# Altium PCB zrxpcb.PcbDoc
Units mm, origin at the board's own origin, x right, y up, seen from the top; angles counter-clockwise.
Board outline 152.4 x 101.6 mm, 2 copper layers (Top Layer, Bottom Layer); 64 components, 60 nets, 272 pads, 51 vias.
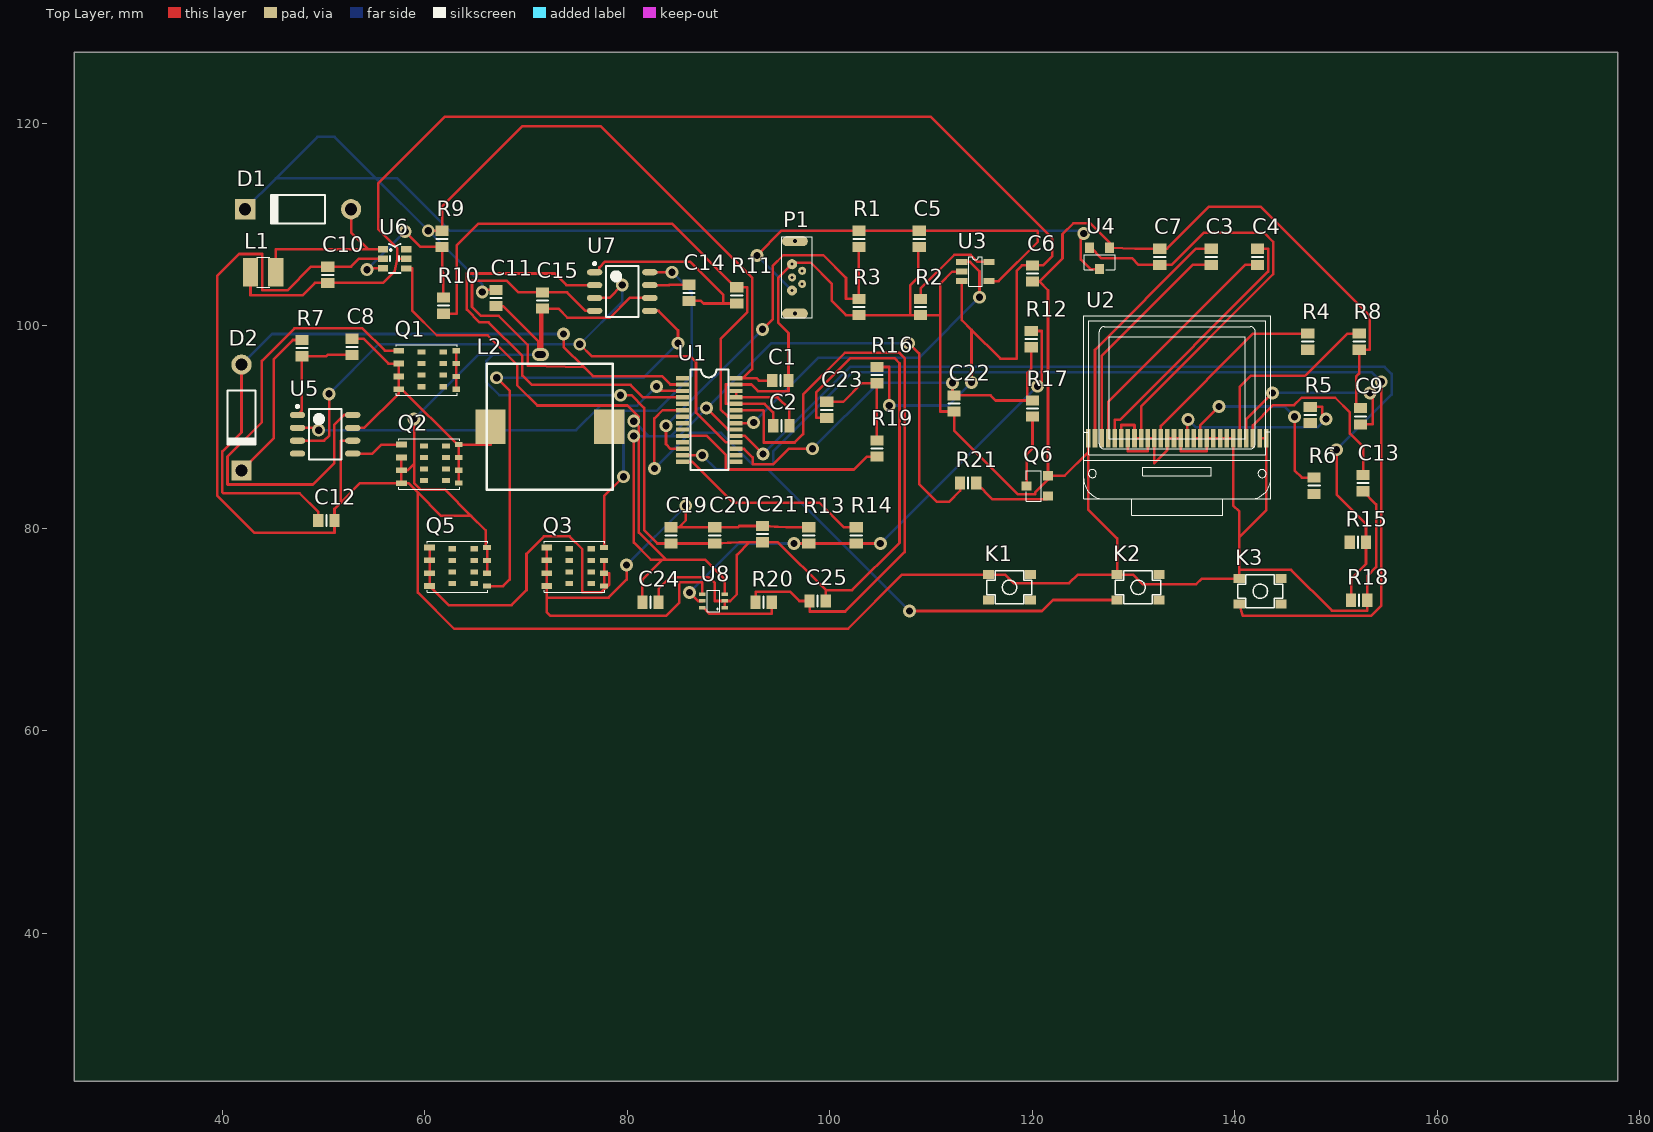
[diagram p0: Top Layer view]
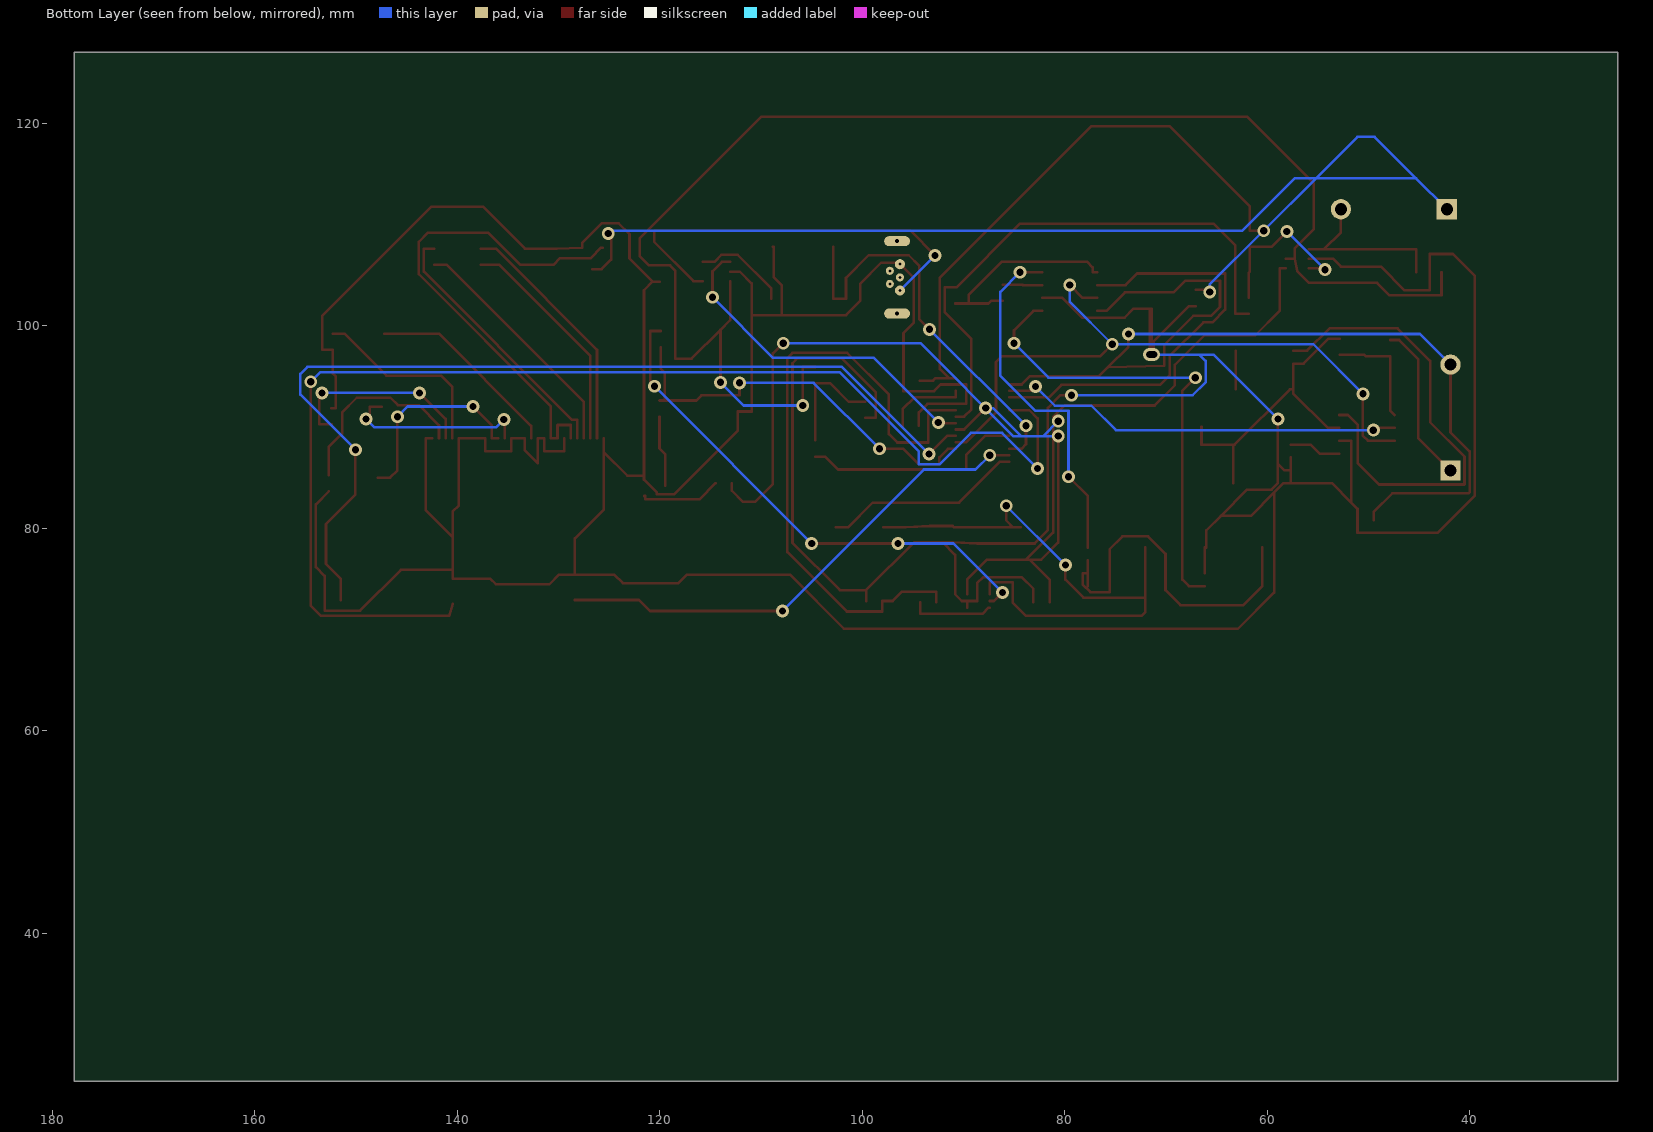
[diagram p1: Bottom Layer view, seen from below]

## Layer stack, top to bottom
Top Solder: solder mask 0.0102, Solder Resist, Dk 3.5
Top Layer: signal copper 0.0356
Dielectric 1: dielectric 0.32, FR-4, Dk 4.8
Bottom Layer: signal copper 0.0356
Bottom Solder: solder mask 0.0102, Solder Resist, Dk 3.5

## Board outline
25.4,25.4 177.8,25.4 177.8,127 25.4,127

## Design rules (kind name [scope] priority, off if disabled: settings)
Clearance [All] p1: gap=0.254
PolygonConnect [All] p1: connectstyle=Relief reliefconductorwidth=0.254 reliefentries=4 polygonreliefangle="90 Angle" airgapwidth=0.254
RoutingVias [All] p1: holewidth=0.711 width=1.27 viastyle="Through Hole" minholewidth=0.711 minwidth=1.27 maxholewidth=0.711 maxwidth=1.27
SolderMaskExpansion [All] p1: expansion=0.102
Width Width_1 [All] p1: maxlimit=0.254 minlimit=0.254 preferedwidth=0.254
Width [All] p2: maxlimit=1.016 minlimit=0.635 preferedwidth=0.762
30 further rules are at their usual default settings.

## Classes and differential pairs
component class 输入模块: K1 K2 K3 R15 R18
component class 电源模块: C5 C6 C8 C10 C11 C12 C14 C15 D1 D2 L1 L2 P1 Q1 Q2 Q3 Q5 R1 R2 R3 R7 R9 R10 R11 U3 U5 U6 U7
component class 显示模块: C3 C4 C7 C9 C13 R4 R5 R6 R8 U2 U4
component class 主控模块: C1 C2 C19 C20 C21 C22 C23 C24 C25 Q6 R12 R13 R14 R16 R17 R19 R20 R21 U1 U8

## Components (designator, comment, footprint, x,y, rotation, side; value= is the part's Value field where it differs from the comment)
C1 "1uF" 6-0805_L 95.123,94.577 r0 top
C2 "1uF" 6-0805_L 95.212,90.132 r0 top
C3 "1uF" 6-0805_L 137.668,106.807 r90 top
C4 "1uF" 6-0805_L 142.24,106.807 r90 top
C5 "10uF" 6-0805_L 108.839,108.585 r90 top
C6 "10uF" 6-0805_L 120.015,105.156 r90 top
C7 "4.7uF" 6-0805_L 132.588,106.807 r270 top
C8 "104" 6-0805_L 52.832,97.917 r90 top
C9 "4.7uF" 6-0805_L 152.4,91.059 r90 top
C10 "10uF" 6-0805_L 50.419,105.029 r90 top
C11 "10uF" 6-0805_L 67.056,102.743 r90 top
C12 "1uF" 6-0805_L 50.292,80.772 r180 top
C13 "4.7uF" 6-0805_L 152.654,84.455 r270 top
C14 "104" 6-0805_L 86.106,103.251 r90 top
C15 "1uF" 6-0805_L 71.628,102.489 r90 top
C19 "22uF" 6-0805_L 84.328,79.299 r90 top
C20 "22uF" 6-0805_L 88.646,79.299 r90 top
C21 "22uF" 6-0805_L 93.345,79.426 r90 top
C22 "104" 6-0805_L 112.268,92.329 r90 top
C23 "103" 6-0805_L 99.695,91.694 r90 top
C24 "104" 6-0805_L 82.296,72.695 r180 top
C25 "104" 6-0805_L 98.806,72.822 r180 top
D1 "1N5819" DO-41 47.498,111.506 r180 top
D2 "1N5819" DO-41 41.91,90.932 r270 top
K1 "SW-PB" 4KEY_SMT 117.729,74.168 r0 top
K2 "SW-PB" 4KEY_SMT 130.429,74.168 r0 top
K3 "SW-PB" 4KEY_SMT 142.494,73.787 r0 top
L1 "10uH" CD32 42.799,105.283 r90 top
L2 "4.7uH" IND12_12 78.613,90.043 r0 top
P1 "USB" M-USB-V 96.774,104.775 r0 top
Q1 "AON6512" SON5_6mm 60.198,95.631 r0 top
Q2 "AON6512" SON5_6mm 60.452,86.36 r0 top
Q3 "AON6512" SON5_6mm 74.803,76.2 r0 top
Q5 "AON6512" SON5_6mm 63.246,76.2 r0 top
Q6 "ME2302-N" SOT-23 121.539,83.185 r90 top
R1 "10K" 6-0805_L 102.87,108.585 r90 top
R2 "2" 6-0805_L 108.966,101.854 r90 top
R3 "100K" 6-0805_L 102.87,101.854 r90 top
R4 "10K" 6-0805_L 147.193,98.425 r90 top
R5 "10K" 6-0805_L 147.447,91.186 r90 top
R6 "10K" 6-0805_L 147.828,84.201 r90 top
R7 "1K" 6-0805_L 47.879,97.79 r90 top
R8 "910K" 6-0805_L 152.273,98.425 r90 top
R9 "150K" 6-0805_L 61.722,108.585 r90 top
R10 "10K" 6-0805_L 61.849,101.981 r90 top
R11 "1K" 6-0805_L 90.805,102.997 r90 top
R12 "3K" 6-0805_L 119.888,98.679 r90 top
R13 "0.002R" 6-0805_L 97.917,79.299 r270 top
R14 "10K" 6-0805_L 102.616,79.299 r90 top
R15 "NTC" 6-0805_L 152.146,78.613 r180 top
R16 "30K" 6-0805_L 104.648,95.123 r90 top
R17 "1K" 6-0805_L 120.015,91.821 r90 top
R18 "10K" 6-0805_L 152.273,72.898 r180 top
R19 "10K" 6-0805_L 104.648,87.884 r90 top
R20 "1K" 6-0805_L 93.472,72.695 r180 top
R21 "1K" 6-0805_L 113.665,84.455 r0 top
U1 "28SSOP" 28SSOP 85.471,94.831 r0 top
U2 "28 OLED" 28OLED 133.985,88.9 r90 top
U3 "ME4054" SOT23-5 113.03,106.299 r270 top
U4 "6209-3.3V" SOT-23 127.635,107.696 r180 top
U5 "ADP3110A" ADP3110A 50.165,89.281 r0 top
U6 "MT3608" SOT-23-6 55.88,107.569 r270 top
U7 "ADP3110A" ADP3110A 79.502,103.378 r0 top
U8 "INA199" SC70-6 88.519,72.822 r90 top

## Footprints (in the part's own frame and the unit in brackets; to place one, negate y for a bottom-side part, rotate by r counter-clockwise, add the part's x,y. Pads: shape width x height; smd on the part's side, far side on the other; paste and mask are expansions set on the pad)
4KEY_SMT [mm]
  rect 1.1x0.9 smd: 1(-2.06,1.25) 2(-2.06,-1.25) 3(2.06,1.25) 4(2.06,-1.25)
  silkscreen extent -2.22,-1.64 2.24,1.64
6-0805_L [mm]
  rect 1x1.3 smd: 1(-0.8,0) 2(0.8,0)
  silkscreen extent 0,-0.55 0,0.55
28OLED [mm]
  rect 1.8x0.45 smd: 1(0,8.45) 2(0,7.8) 3(0,7.15) 4(0,6.5) 5(0,5.85) 6(0,5.2) 7(0,4.55) 8(0,3.9) 9(0,3.25) 10(0,2.6) 11(0,1.95) 12(0,1.3) 13(0,0.65) 14(0,0) 15(0,-0.65) 16(0,-1.3) 17(0,-1.95) 18(0,-2.6) 19(0,-3.25) 20(0,-3.9) 21(0,-4.55) 22(0,-5.2) 23(0,-5.85) 24(0,-6.5) 25(0,-7.15) 26(0,-7.8) 27(0,-8.45) 28(0,-9.1)
  silkscreen extent -7.6,-9.55 12.1,8.91
28SSOP [mil]
  rect 50x17 smd: 1(0,0) 2(0,-25) 3(0,-50) 4(0,-75) 5(0,-100) 6(0,-125) 7(0,-150) 8(0,-175) 9(0,-200) 10(0,-225) 11(0,-250) 12(0,-275) 13(0,-300) 14(0,-325) 15(208,-325) 16(208,-300) 17(208,-275) 18(208,-250) 19(208,-225) 20(208,-200) 21(208,-175) 22(208,-150) 23(208,-125) 24(208,-100) 25(208,-75) 26(208,-50) 27(208,-25) 28(208,0)
  silkscreen extent 30,-358 178,33
ADP3110A [mm] "SOIC, 8-Leads, Body 4.90x3.90mm, Pitch 1.27mm, IPC Medium Density"
  oval 1.52x0.6 smd: 1(-2.725,1.905) 2(-2.725,0.635) 3(-2.725,-0.635) 4(-2.725,-1.905) 5(2.725,-1.905) 6(2.725,-0.635) 7(2.725,0.635) 8(2.725,1.905)
  silkscreen extent -2.85,-2.5 1.6,2.88, body extent -2,-2.5 2,2.5, height 1.35
CD32 [mm]
  rect 2.8x1.5 smd: 1(0,0) 2(0,-2.5)
  silkscreen extent -1.5,-1.9 1.5,-0.6
DO-41 [mm]
  round 2 hole 1.2: 1(-5.23,0)
  rect 2x2 hole 1.2: 2(5.23,0)
  silkscreen extent -2.65,-1.4 2.75,1.4
IND12_12 [mm]
  rect 3x3.4 smd: 1(-12.119,0) 2(-0.381,0)
  silkscreen extent -12.5,-6.22 -0.05,6.22
M-USB-V [mm]
  oval 2.56x1 hole 0.4: 0(-0.22,3.575) 0/2(-0.22,-3.575)
  round 1 hole 0.31: 1(-0.5,-1.3)
  round 0.8 hole 0.3: 2(0.5,-0.65) 3(-0.5,0) 4(0.5,0.65)
  round 1 hole 0.3: 5(-0.5,1.3)
  silkscreen extent -1.5,-4 1.5,4
SC70-6 [mm]
  rect 0.35x0.65 smd: 1(-0.65,-1.1) 2(0,-1.1) 3(0.65,-1.1) 4(0.65,1.1) 5(0,1.1) 6(-0.65,1.1)
  silkscreen extent -1.07,-0.6 1.07,0.6
SON5_6mm [mil]
  rect 42.2x22.13 smd: 1(-108.54,75) 2(-108.54,25) 3(-108.54,-25) 4(-108.54,-75)
  rect 30.16x20 smd: 5(114.57,-75) 6(114.57,-25) 7(114.57,25) 8(114.57,75) 9(64.57,70) 10(-20.43,70) 11(-20.43,25) 12(64.57,25) 13(64.57,-20) 14(-20.43,-20) 15(-20.43,-65) 16(64.57,-65)
  silkscreen extent -118,-98 118,98
SOT23-5 [mm]
  rect 0.6x1.1 smd: 1(0,0) 2(0.95,0) 3(1.9,0) 4(1.9,2.7) 5(0,2.7)
  silkscreen extent -0.5,0.7 2.4,2
SOT-23 [mm]
  rect 0.9x1 smd: 1(0,0) 2(2.001,-0.007) 3(1,2.1)
  silkscreen extent -0.51,0.68 2.51,2.16
SOT-23-6 [mm]
  rect 0.65x1 smd: 1(0,0) 2(0.95,0) 3(1.9,0) 5(0.95,2.3) 6(0,2.3)
  rect 0.6x1 smd: 4(1.9,2.3)
  silkscreen extent -0.52,0.6 2.37,1.74

## Part data
C1 C2 C3 C4 C5 C6 C7 C8 C9 C10 C11 C12 C13 C14 C15 C19 C20 C21 C22 C23 C24 C25: library part CAP, "Capacitor"
D1 D2: library part "Diode 1N4001", "1 Amp General Purpose Rectifier"
L1: library part INDUCTOR2
L2: library part INDUCTOR
P1: library part "5 PIN CONNECTOR"
Q1 Q2 Q3 Q5: library part MOS, "Singe 8pin"
Q6: library part NMOS-2, "N-Channel Power MOSFET"
R1 R2 R3 R4 R5 R6 R7 R8 R9 R10 R11 R12 R13 R14 R15 R16 R17 R18 R19 R20 R21: library part Res1_1, "Resistor"
U1: library part HT45HF4N
U2: library part 28OLED
U4: library part LDO

## Via types
v1: diameter 1.27, hole 0.711, Top Layer to Bottom Layer, 51 vias

## Nets (pads, with @x,y where several pads share a name; then routed paths per layer and width w, separated by ;. In a path a pad name is that pad's centre, name@x,y a point inside that pad or via, vN(x,y) a via of type N, cw(c..) or ccw(c..) an arc to the next point about the centre after c; other vN are vias at no path point)
AD-VBAT: C23.2 R16.1 R19.2 | length 11.3
  Top Layer w0.254: C23.2 101.346,92.494 103.175,94.323 R16.1 R19.2
DRIVERH: Q1.1 U5.8 | length 46.8
  Top Layer w0.254: U5.8 52.045,91.186 51.062,90.203 51.062,86.419 48.964,84.321 40.529,84.321 40.529,87.083 43.917,90.471 43.917,96.52 47.142,99.746 53.848,99.746 56.058,97.536 Q1.1
DRIVERL: Q2.1 U5.5 | length 5.2
  Top Layer w0.254: U5.5 54.839,87.376 55.728,88.265 Q2.1
GND: C1.2 C2.1 C5.1 C6.1 C7.1 C9.2 C10.2 C11.1 C12.1 C13.2 C15.1 C19.1 C20.1 C21.1 C22.1 C23.1 C24.1 C25.1 K1.1 K2.1 K3.1 P1.5 Q2.2 Q2.3 Q2.4 Q5.6 Q5.7 Q5.8 Q6.2 R2.1 R3.1 R8.1 R18.1 U1.24 U1.27 U2.1 U2.7 U2.10 U2.11 U2.13 U2.14 U2.15 U2.19 U2.20 U2.21 U2.22 U2.23 U2.27 U2.28 U3.2 U4.1 U5.6 U6.2 U7.6 U8.1 U8.2 | length 609.5
  Top Layer w0.254: U5.6 51.714,88.646 51.714,82.537 ; U6.2 53.52,106.619 52.73,105.829 C10.2 48.757,105.829 46.43,103.502 43.942,103.502 43.942,107.086 41.681,107.086 39.513,104.918 39.513,83.22 43.18,79.553 51.092,79.553 C12.1 51.092,81.915 51.714,82.537 ; Q2.2 Q2.3 ; v1(58.953,90.805) 58.953,86.36 ; Q5.6 Q5.7 Q5.8 66.015,78.105 66.015,79.807 64.592,81.229 ; C11.1 67.742,101.943 71.222,98.463 v1(71.222,97.155) ; v1(71.425,97.155) 71.425,101.689 C15.1 ; v1(71.628,97.155) C15.1 ; v1(79.324,93.142) 80.416,93.142 81.661,91.897 81.661,79.82 82.982,78.499 C19.1 C20.1 91.059,78.626 92.075,78.626 ; U7.6 80.239,102.743 78.283,100.787 74.092,100.787 73.19,101.689 C15.1 ; C24.1 83.096,74.028 84.252,75.184 88.036,75.184 88.646,74.574 88.646,72.822 U8.2 ; U8.1 89.619,72.492 U8.2 ; C2.1 94.412,91.44 93.561,92.291 U1.24 89.738,92.291 89.738,94.196 U1.27 92.253,94.196 92.903,93.546 95.923,93.546 C1.2 95.923,99.275 94.893,100.305 94.893,104.694 P1.5 96.274,106.223 98.12,106.223 100.203,104.14 100.203,102.451 101.6,101.054 R3.1 107.925,101.054 ; C25.1 99.606,73.889 ; C23.1 98.654,90.894 98.654,93.396 102.062,96.804 106.375,96.804 106.883,96.296 106.883,78.562 102.21,73.889 99.606,73.889 ; C5.1 108.737,107.785 108.737,104.8 107.925,103.988 107.925,101.054 ; U3.2 112.09,105.349 110.922,104.181 110.922,101.054 ; U2.1 125.535,87.531 ; U2.7 129.435,87.605 131.385,87.605 U2.10 U2.11 132.035,86.415 133.335,87.715 U2.13 U2.14 U2.15 134.635,87.605 137.235,87.605 U2.19 U2.20 U2.21 U2.22 U2.23 139.835,82.26 140.434,81.661 140.434,79.118 ; U2.27 U2.28 143.085,81.769 140.434,79.118 ; C9.2 151.967,91.859 151.967,94.976 152.273,95.282 R8.1 153.314,97.625 153.314,100.99 142.545,111.76 137.465,111.76 133.312,107.607 C7.1 130.188,107.607 U4.1 127.635,108.204 125.73,110.109 124.04,110.109 122.978,109.047 122.978,106.646 120.692,104.36 ; C13.2 153.949,82.36 153.949,76.175 153.073,75.298 R18.1 153.073,71.867 149.57,71.867 145.542,75.895 140.434,75.895 ; 51.714,82.537 53.632,84.455 Q2.4 ; Q2.4 58.395,84.455 59.334,83.515 ; Q2.4 Q2.3 ; Q2.3 58.318,85.725 58.953,86.36 ; 58.953,86.36 58.953,84.455 59.588,83.82 62.001,83.82 64.592,81.229 ; 59.334,83.515 61.62,81.229 64.592,81.229 ; 59.334,83.515 59.334,73.66 62.916,70.079 101.807,70.079 107.147,75.418 K1.1 117.317,75.418 118.161,74.574 123.642,74.574 124.485,75.418 K2.1 ; U8.2 90.17,72.822 90.833,73.485 90.833,77.384 92.075,78.626 ; 92.075,78.626 C21.1 94.856,78.626 99.606,73.889 ; 107.925,101.054 R2.1 110.922,101.054 ; 110.922,101.054 110.922,91.529 C22.1 112.268,89.653 118.567,83.354 120.269,83.354 120.269,83.533 121.546,84.811 Q6.2 ; 120.692,104.36 120.688,104.356 C6.1 120.692,104.36 ; 120.692,104.36 121.546,103.505 Q6.2 ; Q6.2 123.19,85.186 125.535,87.531 ; 125.535,87.531 125.535,81.828 128.369,78.994 K2.1 ; K2.1 129.946,75.418 130.892,74.473 136.169,74.473 136.734,75.037 K3.1 140.434,75.895 ; 140.434,75.895 140.434,79.118
  Bottom Layer w0.254: v1(58.953,90.805) 65.303,97.155 66.726,97.155 ; v1(71.628,97.155) v1(71.425,97.155) v1(71.222,97.155) 66.726,97.155 ; v1(79.324,93.142) 67.361,93.142 66.091,94.412 66.091,96.52 66.726,97.155
HD: D2.2 R7.2 | length 15.9
  Top Layer w0.254: D2.2 45.085,88.877 45.085,96.685 46.99,98.59 R7.2
HS: Q3.5 Q3.6 Q3.7 Q5.1 Q5.2 Q5.3 Q5.4 | length 36.5
  Top Layer w0.254: Q5.1 Q5.2 Q5.3 Q5.4 62.369,72.415 68.58,72.415 70.053,73.889 70.053,77.47 71.78,79.197 74.295,79.197 75.556,77.936 75.556,73.685 77.47,73.685 78.232,74.447 78.232,75.565 Q3.6 ; Q3.5 Q3.6 ; Q3.7 Q3.6
NetC3_1: C3.1 U2.3 | length 22.7
  Top Layer w0.254: U2.3 126.835,97.015 135.827,106.007 C3.1
NetC3_2: C3.2 U2.2 | length 24.3
  Top Layer w0.254: U2.2 126.185,97.623 136.169,107.607 C3.2
NetC4_1: C4.1 U2.4 | length 23.9
  Top Layer w0.254: U2.4 127.485,92.471 141.021,106.007 C4.1
NetC4_2: C4.2 U2.5 | length 26.3
  Top Layer w0.254: U2.5 128.135,90.708 128.647,90.708 143.281,105.342 143.281,107.607 C4.2
NetC5_2: C5.2 P1.1 R1.2 U3.4 | length 41.1
  Top Layer w0.254: v1(92.807,106.942) 95.25,109.385 R1.2 C5.2 120.465,109.385 120.535,109.314 120.535,108.272 116.662,104.399 U3.4
  Bottom Layer w0.254: v1(92.807,106.942) P1.1
NetC7_2: C7.2 U2.6 U2.8 U2.9 U4.2 | length 49.9
  Top Layer w0.254: U4.2 125.771,107.703 126.795,106.68 129.819,106.68 130.492,106.007 C7.2 133.756,106.007 136.944,109.195 142.875,109.195 143.789,108.28 143.789,105.099 130.735,92.045 U2.9 U2.8 130.085,90.158 130.048,90.195 128.785,90.195 U2.6
NetC8_1: C8.1 R7.1 U5.1 | length 11
  Top Layer w0.254: U5.1 47.879,91.625 R7.1 50.292,96.99 50.419,97.117 C8.1
NetC8_2: C8.2 L2.1 Q1.2 Q1.3 Q1.4 Q2.5 Q2.6 Q2.7 Q2.8 U5.7 | length 31.4
  Top Layer w0.254: C8.2 53.975,98.717 56.426,96.266 Q1.2 Q1.3 Q1.4 ; U5.7 54.026,89.916 57.441,93.331 Q1.4 ; Q2.5 Q2.6 Q2.7 Q2.8 ; L2.1 66.494,88.265 Q2.8 ; Q1.4 57.76,93.726 63.221,88.265 Q2.8
NetC9_1: C9.1 U2.25 | length 19.6
  Top Layer w0.254: U2.25 141.135,90.792 v1(143.713,93.37) ; C9.1 153.619,90.259 153.619,93.091 v1(153.34,93.37)
  Bottom Layer w0.254: v1(143.713,93.37) v1(153.34,93.37)
NetC13_1: C13.1 U2.26 | length 19.3
  Top Layer w0.254: U2.26 141.785,90.17 143.766,92.151 145.846,92.151 146.583,92.888 149.911,92.888 151.359,91.44 151.359,89.357 152.654,88.062 C13.1
NetC14_1: C14.1 R11.1 U7.1 | length 20.4
  Top Layer w0.254: U7.1 77.241,105.283 77.241,105.766 77.8,106.324 86.208,106.324 89.497,103.035 89.497,102.197 ; C14.1 87.274,102.451 87.528,102.197 89.497,102.197 ; R11.1 89.497,102.197
NetC14_2: C14.2 U7.7 | length 3.9
  Top Layer w0.254: U7.7 84.125,104.013 84.163,104.051 C14.2
NetC22_2: C22.2 R12.1 R17.2 U1.17 | length 40.5
  Top Layer w0.254: U1.17 91.529,87.846 92.38,86.995 92.38,86.309 94.412,86.309 95.961,87.859 v1(98.298,87.859) ; v1(112.116,94.361) 112.116,93.129 C22.2 115.875,93.129 116.383,92.621 R17.2@119.507,92.621 ; R12.1 119.888,95.744 119.507,95.363 R17.2@119.507,92.621 ; R17.2 R17.2@119.507,92.621
  Bottom Layer w0.254: v1(98.298,87.859) 104.8,94.361 v1(112.116,94.361)
NetC24_2: C24.2 R21.1 U1.20 U6.4 U8.3 | length 137.7
  Top Layer w0.254: U6.4 58.776,105.669 58.776,101.473 61.189,99.06 66.218,99.06 69.138,96.14 69.138,94.108 71.12,92.126 80.01,92.126 81.153,90.983 v1@80.696,90.526 ; v1(80.645,89.103) 80.645,78.588 82.321,76.911 83.477,76.911 ; v1(80.645,90.576) v1@80.696,90.526 ; C24.2 81.496,74.93 83.477,76.911 ; v1(87.808,91.872) 89.929,89.751 U1.20 ; U8.3 89.637,73.472 89.637,74.93 87.655,76.911 83.82,76.911 ; v1(107.798,98.273) 108.814,97.257 108.814,84.379 110.592,82.601 111.76,82.601 112.865,83.706 R21.1 ; v1@80.696,90.526 81.153,90.068 81.153,89.103 81.153,79.578 83.82,76.911 ; 83.477,76.911 83.82,76.911
  Bottom Layer w0.254: v1(80.645,89.103) 82.118,89.103 ; v1(80.645,90.576) 82.118,89.103 ; v1(87.808,91.872) 87.097,91.872 84.328,89.103 ; v1(107.798,98.273) 94.259,98.273 85.09,89.103 84.328,89.103 ; 82.118,89.103 84.328,89.103
NetC25_2: C25.2 R20.2 U1.23 | length 64.7
  Top Layer w0.254: U1.23 93.434,91.656 93.497,91.593 93.497,88.468 96.52,88.468 97.358,89.306 97.358,93.193 101.478,97.312 106.883,97.312 107.391,96.804 107.391,77.648 101.524,71.78 98.006,71.78 C25.2 97.003,72.822 96.088,73.736 92.672,73.736 R20.2
NetD1_1: D1.1 L1.2 U6.1 | length 17.5
  Top Layer w0.254: L1.2 45.299,107.569 54.379,107.569 ; D1.1 52.728,109.22 54.379,107.569 ; U6.1 54.379,107.569
NetK1_2: K1.2
NetK2_2: K2.2 U1.13 | length 49.7
  Top Layer w0.254: U1.13 v1(87.401,87.211) ; v1(107.874,71.831) 120.955,71.831 122.042,72.918 K2.2
  Bottom Layer w0.254: v1(87.401,87.211) 88.811,85.801 93.904,85.801 v1(107.874,71.831)
NetK3_2: K3.2 U1.6 | length 124.9
  Top Layer w0.254: v1(82.677,85.903) 82.677,90.843 83.49,91.656 U1.6 ; K3.2 140.779,71.359 153.426,71.359 154.457,72.39 v1(154.457,94.463)
  Bottom Layer w0.254: v1(82.677,85.903) 86.191,89.417 89.272,89.417 92.38,86.309 94.412,86.309 94.412,87.577 102.263,95.428 153.492,95.428 v1(154.457,94.463)
NetL2_2: L2.2
NetQ3_8: Q3.8 U7.8 | length 35.7
  Top Layer w0.254: Q3.8 77.724,78.105 77.724,83.185 v1(79.629,85.09) ; U7.8 v1(84.43,105.283)
  Bottom Layer w0.254: v1(79.629,85.09) 79.629,91.592 82.898,91.592 86.36,95.054 86.36,103.353 v1(84.43,105.283)
NetQ5_5: Q5.5 U7.5 | length 47.1
  Top Layer w0.254: Q5.5 67.742,74.295 68.377,74.93 68.377,93.599 v1(67.107,94.869) ; U7.5 83.083,101.473 85.014,99.543 v1(85.014,98.273)
  Bottom Layer w0.254: v1(67.107,94.869) 81.61,94.869 v1(85.014,98.273)
NetQ6_1: Q6.1 R21.2 | length 8.1
  Top Layer w0.254: R21.2 116.074,82.846 121.403,82.846 121.403,83.185 Q6.1
NetQ6_3: Q6.3 R17.1 | length 7.1
  Top Layer w0.254: Q6.3 119.439,87.3 120.015,87.876 R17.1
NetR1_1: R1.1 R3.2 U1.12 | length 40.9
  Top Layer w0.254: v1(83.829,90.128) 83.829,88.307 84.29,87.846 U1.12 ; v1(93.345,99.644) 94.385,100.684 94.385,105.942 95.402,106.959 99.365,106.959 101.6,104.724 101.6,102.654 R3.2 R1.1
  Bottom Layer w0.254: v1(83.829,90.128) v1(93.345,99.644)
NetR2_2: R2.2 U3.5 | length 9.5
  Top Layer w0.254: R2.2 108.966,103.683 112.293,107.01 113.894,107.01 114.605,106.299 U3.5
NetR4_2: R4.2 U2.12 | length 19.5
  Top Layer w0.254: U2.12 132.685,90.102 141.808,99.225 R4.2
NetR5_2: R5.2 U2.16 | length 18.7
  Top Layer w0.254: U2.16 135.285,90.627 v1(135.387,90.729) ; R5.2 148.641,91.986 148.641,91.135 v1(148.996,90.78)
  Bottom Layer w0.254: v1(135.387,90.729) 136.132,89.983 148.2,89.983 v1(148.996,90.78)
NetR6_2: R6.2 U2.17 U2.18 | length 19.9
  Top Layer w0.254: U2.17 U2.18 136.585,90.179 v1(138.43,92.024) ; v1(145.898,91.008) 145.898,85.725 146.622,85.001 R6.2
  Bottom Layer w0.254: v1(138.43,92.024) 144.882,92.024 v1(145.898,91.008)
NetR8_2: R8.2 U2.24 | length 19
  Top Layer w0.254: U2.24 140.485,93.98 141.577,95.072 146.977,95.072 151.13,99.225 R8.2
NetR9_1: R9.1 R10.2 U6.3 | length 16.3
  Top Layer w0.254: v1(54.305,105.537) 54.437,105.669 U6.3 ; v1(58.071,109.303) 59.588,107.785 R9.1 61.722,105.334 61.849,105.207 R10.2
  Bottom Layer w0.254: v1(54.305,105.537) v1(58.071,109.303)
NetR10_1: R10.1 R11.2 U1.22 | length 55.2
  Top Layer w0.254: R10.1 63.144,101.181 63.144,107.925 65.31,110.091 84.404,110.091 90.698,103.797 R11.2 91.846,103.797 91.846,101.321 89.23,98.704 89.23,91.717 89.927,91.021 U1.22
NetR14_2: R14.2 U1.14 | length 19.8
  Top Layer w0.254: U1.14 86.385,86.576 90.437,82.525 98.958,82.525 101.384,80.099 R14.2
NetR15_1: R15.1 R18.2 U1.19 | length 95.7
  Top Layer w0.254: U1.19 91.605,89.116 v1(93.396,87.325) ; v1(150.038,87.757) 150.038,83.325 152.946,80.416 R15.1 152.946,76.479 151.473,75.006 R18.2
  Bottom Layer w0.254: v1(93.396,87.325) 102.006,95.936 154.788,95.936 155.473,95.25 155.473,93.193 v1(150.038,87.757)
NetR19_1: R19.1 U1.10 | length 21.9
  Top Layer w0.254: U1.10 87.859,89.116 89.738,87.236 89.738,85.801 102.387,85.801 103.67,87.084 R19.1
NetR20_1: R20.1 U8.6 | length 8.3
  Top Layer w0.254: U8.6 87.518,72.172 88.138,71.552 94.272,71.552 R20.1
NetU1_3: U1.3 U5.2 | length 40.1
  Top Layer w0.254: U5.2 49.301,89.916 v1(49.53,89.687) ; v1(82.88,94.005) 83.325,93.561 U1.3
  Bottom Layer w0.254: v1(49.53,89.687) 74.955,89.687 77.368,92.1 80.975,92.1 v1(82.88,94.005)
NetU1_4: U1.4 U7.2 | length 42.7
  Top Layer w0.254: U7.2 73.99,104.013 72.847,105.156 64.16,105.156 64.16,101.6 65.43,100.33 66.319,100.33 69.646,97.003 69.646,95.088 70.576,94.158 80.34,94.158 81.572,92.926 U1.4
NetU1_5: U1.5
NetU1_7: U1.7
NetU1_8: U1.8
NetU1_9: U1.9
NetU1_11: U1.11
NetU1_15: U1.15
NetU1_18: U1.18 U5.3 U7.3 | length 67.5
  Top Layer w0.254: U5.3 50.079,88.646 50.554,89.121 v1(50.554,93.277) ; v1(75.311,98.171) 76.505,96.977 86.233,96.977 86.792,96.418 86.792,91.427 89.738,88.481 U1.18 ; U7.3 78.232,102.743 v1(79.502,104.013)
  Bottom Layer w0.254: v1(50.554,93.277) 55.448,98.171 v1(75.311,98.171) 79.502,102.362 v1(79.502,104.013)
NetU1_21: U1.21 U3.1 | length 33.9
  Top Layer w0.254: U1.21 92.418,90.386 v1(92.481,90.449) ; U3.1 113.843,106.299 114.783,105.359 v1(114.783,102.819)
  Bottom Layer w0.254: v1(92.481,90.449) 98.857,96.825 108.788,96.825 v1(114.783,102.819)
V33: R15.2
V50: C2.2 U1.25 U1.26 | length 8
  Top Layer w0.254: U1.26 U1.25 94.844,92.926 96.012,91.758 C2.2
VBA1: Q1.5 Q1.6 Q1.7 Q1.8 | length 3.8
  Top Layer w0.254: Q1.5 Q1.6 Q1.7 Q1.8
VBAT: C6.2 C10.1 L1.1 R16.2 U3.3 U6.5 | length 146.8
  Top Layer w0.254: L1.1 42.799,102.994 47.914,102.994 49.149,104.229 C10.1 55.88,104.229 57.048,105.397 57.277,106.619 ; U6.5 57.277,106.619 ; R16.2 105.867,95.923 v1(105.867,92.126) ; U3.3 113.03,100.559 113.995,99.593 ; v1(113.995,94.412) 113.995,99.593 ; 57.277,106.619 57.277,107.671 55.423,109.525 55.423,114.071 62.001,120.65 109.957,120.65 121.971,108.636 121.971,106.87 121.056,105.956 C6.2 118.974,105.956 118.466,105.448 118.466,96.749 116.84,96.749 113.995,99.593
  Bottom Layer w0.254: v1(105.867,92.126) 111.709,92.126 v1(113.995,94.412)
VCH: C1.1 C11.2 D1.2 R9.2 U1.28 U4.3 | length 179.4
  Top Layer w0.254: v1(60.35,109.385) R9.2 61.722,111.785 69.647,119.71 77.343,119.71 92.354,104.699 92.354,100.686 92.329,100.66 92.329,95.72 91.44,94.831 ; v1(65.684,103.327) 65.9,103.543 C11.2 ; U1.28 91.44,94.831 ; C1.1 93.007,94.577 92.753,94.831 91.44,94.831 ; v1(125.07,109.093) 124.79,108.814 124.79,106.536 125.73,105.596 U4.3
  Bottom Layer w0.254: D1.2 45.316,114.554 ; v1(65.684,103.327) 65.684,104.051 v1(60.35,109.385) 55.181,114.554 ; v1(125.07,109.093) 124.765,109.398 62.459,109.398 57.302,114.554 55.181,114.554 ; 45.316,114.554 55.181,114.554 ; 45.316,114.554 49.405,118.643 51.092,118.643 55.181,114.554
VCH1: C12.2 C15.2 D2.1 U1.2 U7.4 | length 102.7
  Top Layer w0.254: D2.1 41.91,89.48 40.021,87.591 40.021,83.546 40.128,83.439 47.663,83.439 49.492,81.61 C12.2 ; v1(73.711,99.187) 73.711,97.917 75.717,95.91 ; U7.4 75.87,101.473 74.054,103.289 C15.2 69.253,103.289 68.097,104.445 64.668,104.445 64.668,101.854 65.557,100.965 67.31,100.965 70.154,98.121 70.154,96.053 75.717,95.91 ; U1.2 84.264,94.196 83.437,95.023 76.605,95.023 75.717,95.91
  Bottom Layer w0.254: D2.1 44.935,99.187 v1(73.711,99.187)
VOUT: R12.2 R13.2 R14.1 U8.5 | length 51.1
  Top Layer w0.254: v1(86.157,73.66) 86.995,72.822 U8.5 ; v1(96.469,78.499) R13.2 R14.1 v1(104.991,78.499) ; R12.2 120.929,99.479 120.929,94.437 v1(120.523,94.031)
  Bottom Layer w0.254: v1(86.157,73.66) 90.996,78.499 v1(96.469,78.499) ; v1(104.991,78.499) v1(120.523,94.031)
VOUT1: C19.2 C20.2 C21.2 Q3.1 Q3.2 Q3.3 Q3.4 R13.1 U8.4 | length 60.1
  Top Layer w0.254: Q3.1 Q3.2 Q3.3 Q3.4 72.034,74.295 72.034,73.152 ; v1(79.934,76.378) 79.934,74.93 78.156,73.152 72.034,73.152 ; C19.2 85.09,80.099 ; v1(85.776,82.22) 85.776,80.785 85.09,80.099 ; U8.4 87.419,74.676 85.141,74.676 85.141,72.669 83.82,71.349 72.441,71.349 72.034,71.755 72.034,73.152 ; R13.1 95.682,80.099 C21.2 91.059,80.226 90.932,80.099 C20.2 85.09,80.099
  Bottom Layer w0.254: v1(79.934,76.378) v1(85.776,82.22)
pads on no net: K1.3 K1.4 K2.3 K2.4 K3.3 K3.4 P1.0 P1.0/2 P1.2 P1.3 P1.4 Q1.9 Q1.10 Q1.11 Q1.12 Q1.13 Q1.14 Q1.15 Q1.16 Q2.9 Q2.10 Q2.11 Q2.12 Q2.13 Q2.14 Q2.15 Q2.16 Q3.9 Q3.10 Q3.11 Q3.12 Q3.13 Q3.14 Q3.15 Q3.16 Q5.9 Q5.10 Q5.11 Q5.12 Q5.13 Q5.14 Q5.15 Q5.16 R4.1 R5.1 R6.1 U1.1 U1.16 U5.4 U6.6

## Keep-outs
Mechanical 1:
  lines w0.254: 157.988,114.808 157.988,121.92 38.1,121.92 38.1,67.056 157.988,67.056 157.988,116.84